# EAGLE board powerboard (EAGLE 9.0.1)
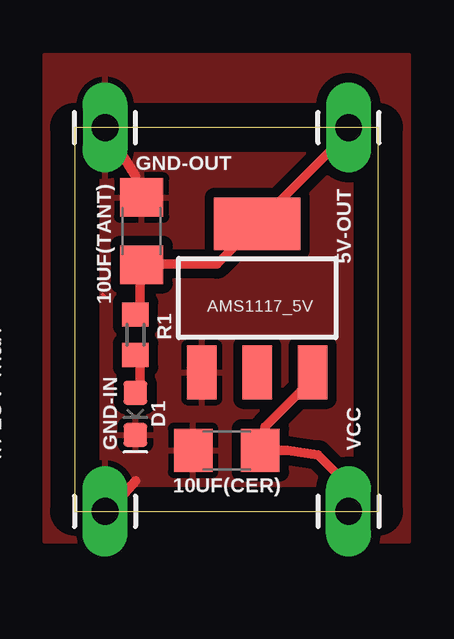
[diagram p0: board, top side]

Size 12.68 x 16 mm. Coordinates in mm from the lower left corner, seen from the top.
Outline: 0,0 12.68,0 12.68,16 0,16 0,0
Copper layers (1*16): Top 0.035mm / dielectric 1.5mm / Bottom 0.035mm
Design rules "default": minimum track width 6mil, minimum drill 0.35mm, track to track 6mil, track to pad 6mil, pad to pad 6mil, via to via 6mil, smd to smd 6mil, copper to edge 40mil, drill to drill 6mil, minimum pad ring 10mil, minimum via ring 8mil, stop-mask expansion 4mil, vias tented up to drill 0mil, thermal gap 10mil
Net classes: 0 default: width 0.4 mm, drill 0.3 mm, clearance 0.4 mm

## Footprints (pad centres in the part's own frame; a part is rotated, then mirrored left to right if it is on the bottom)
1X01_LONGPAD = drill 1.118 pad 1.88 long: 1 0,0
1206 = smd 1.6 x 1.8: 1 -1.4,0; 2 1.4,0
SOT223 = smd 1.219 x 2.235: 1 -2.311,-3.099; 2 0,-3.099; 3 2.311,-3.099 | smd 3.6 x 2.2: 4 0,3.099
LED-0603 = smd 1 x 1: A -0.877,0; C 0.877,0
R0603 = smd 1 x 1.1: 1 -0.85,0; 2 0.85,0

## Placement (x,y rotation side)
5V-OUT  [1X01_LONGPAD]  11.43,16 180 top
10UF(CER)  10uF (cer)  [1206]  6.35,2.54 180 top
10UF(TANT)  10uF  [1206]  2.79,11.68 270 top
AMS1117_5V  [SOT223]  7.62,8.89 0 top
D1  [LED-0603]  2.54,4.06 270 top
GND-IN  [1X01_LONGPAD]  1.27,0 0 top
GND-OUT  [1X01_LONGPAD]  1.27,16 180 top
R1  [R0603]  2.54,7.37 270 top
VCC  [1X01_LONGPAD]  11.43,0 0 top

## Library data of the parts
5V-OUT GND-IN GND-OUT VCC = SparkFun-Connectors
10UF(CER) 10UF(TANT) = SparkFun-Capacitors; PROD_ID: CAP-10057
AMS1117_5V = SparkFun-IC-Power; PROD_ID: VREG-08170
D1 = SparkFun-LED
R1 = Clean-Kong

## Nets
5V: 5V-OUT.1 10UF(TANT).2 AMS1117_5V.4 R1.1
GND: 10UF(CER).2 10UF(TANT).1 AMS1117_5V.1 D1.C GND-IN.1 GND-OUT.1
N$1: D1.A R1.2
VCC: 10UF(CER).1 AMS1117_5V.3 VCC.1

## Tracks (layer width: path | path; a pad name or v marks a point on that pad's centre or on a via)
5V
  Top 0.4: 7.54,11.91 5.94,10.31 2.74,10.31 10UF(TANT).2 2.74,9.91 2.74,8.31 R1.1 | 7.54,11.91 AMS1117_5V.4 | 5V-OUT.1 11.43,15.8 7.54,11.91
GND
  Top 0.152: 2.54,13.97 2.54,12.4 | 1.16,9.03 1.27,8.93
  Top 0.4: GND-OUT.1 2.54,13.97 | 2.54,1.27 1.27,-0.18
  pour Top: -1.27,19.05 13.97,19.05 13.97,-1.27 -1.27,-1.27
N$1
  Top 0.4: D1.A 2.74,5.11 2.74,6.31 R1.2
VCC
  Top 0.4: AMS1117_5V.3 9.94,5.51 7.94,3.51 7.94,2.71 10UF(CER).1 8.89,2.54 10.16,2.36 11.43,1.09 VCC.1

## Text on the board
tNames: In 15V max